# EAGLE board micronucleus_usb_dev_stick (EAGLE 9.5.2)
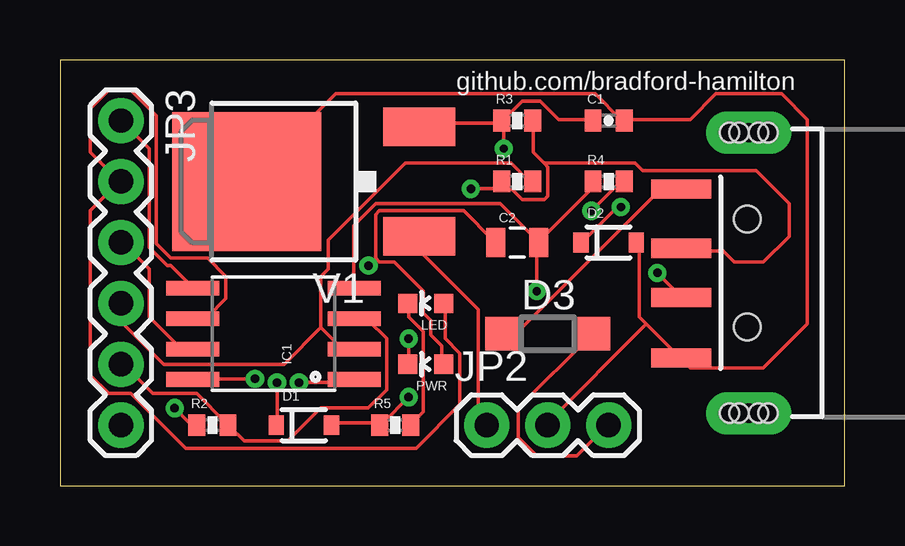
[diagram p0: board, top side]
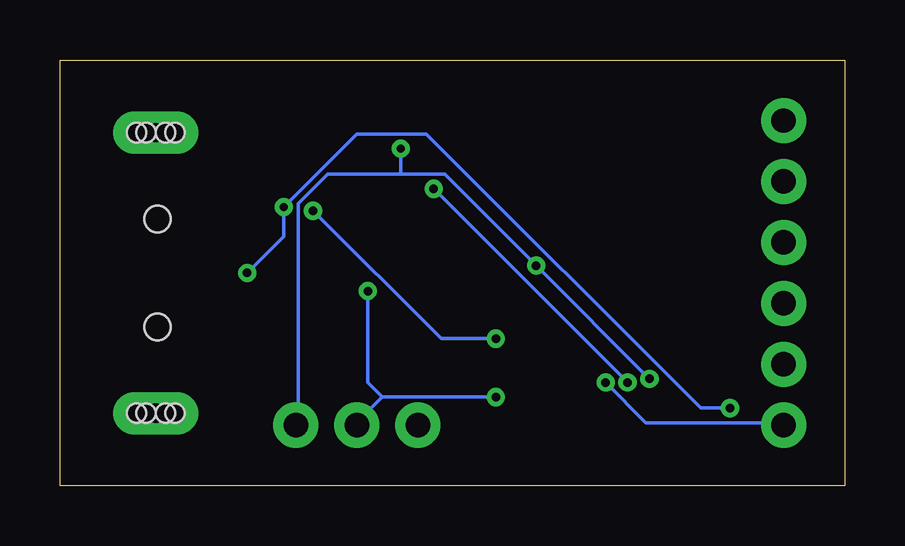
[diagram p1: board, bottom side, seen from below]

Size 32.69 x 17.77 mm. Coordinates in mm from the lower left corner, seen from the top.
Outline: 0,0 32.69,0 32.69,17.77 0,17.77 0,0
Copper layers (1*16): Top 0.035mm / dielectric 1.5mm / Bottom 0.035mm
Design rules "default": minimum track width 6mil, minimum drill 0.35mm, track to track 6mil, track to pad 6mil, pad to pad 6mil, via to via 6mil, smd to smd 6mil, copper to edge 40mil, drill to drill 6mil, minimum pad ring 10mil, minimum via ring 8mil, stop-mask expansion 4mil, vias tented up to drill 0mil, thermal gap 10mil

## Footprints (pad centres in the part's own frame; a part is rotated, then mirrored left to right if it is on the bottom)
0402-CAP = smd 0.7 x 0.9: 1 -0.65,0; 2 0.65,0
0805 = smd 0.8 x 1.2: 1 -0.9,0; 2 0.9,0
SOD-323 = smd 0.63 x 0.83: 1 -1.15,0; 2 1.15,0
SOD123 = smd 1.4 x 1.4: A 1.9,0; C -1.9,0
SO08-EIAJ = smd 0.61 x 2.21: 1 -1.905,-3.378; 2 -0.635,-3.378; 3 0.635,-3.378; 4 1.905,-3.378; 5 1.905,3.353; 6 0.635,3.353; 7 -0.635,3.353; 8 -1.905,3.353
USB-A-SMT-MALE = smd 2.5 x 0.8: D+1 10.95,1.027; D-1 10.95,-1.027; GND1 10.95,3.551; VBUS1 10.95,-3.5 | drill 0.8 pad 1.778 long: SHLD1 8.13,-5.85; SHLD2 8.13,5.85 | hole 1.1: 8.2,2.25; 8.2,-2.25 | hole 0.8: 8.53,-5.85; 8.93,-5.85; 7.73,-5.85; 7.33,-5.85; 8.53,5.85; 8.93,5.85; 7.73,5.85; 7.33,5.85
1X03 = drill 1.016 pad 1.88: 1 0,0; 2 2.54,0; 3 5.08,0
1X06 = drill 1.016 pad 1.88: 1 0,0; 2 2.54,0; 3 5.08,0; 4 7.62,0; 5 10.16,0; 6 12.7,0
LED-0603 = smd 0.8 x 0.8: A 0,-0.75; C 0,0.75
0402-RES = smd 0.7 x 0.9: 1 -0.65,0; 2 0.65,0
DPACK = smd 1.6 x 3: 1 -2.28,-4.8; 3 2.28,-4.8 | smd 5.8 x 6.2: 4 0,2.38

## Placement (x,y rotation side)
C1  0.1uf  [0402-CAP]  22.86,15.24 0 top
C2  4.7uf  [0805]  19.05,10.16 0 top
D1  3.6 Zener  [SOD-323]  10.16,2.54 0 top
D2  3.6 Zener  [SOD-323]  22.86,10.16 0 top
D3  MBR0520LT  [SOD123]  20.32,6.35 0 top
IC1  ATTINY85  [SO08-EIAJ]  8.89,6.35 90 top
J1  USB_A_SMT_MALE  [USB-A-SMT-MALE]  36.83,8.89 180 top
JP2  [1X03]  17.78,2.54 0 top
JP3  [1X06]  2.54,15.24 270 top
LED  [LED-0603]  15.24,7.62 90 top
PWR  [LED-0603]  15.24,5.08 90 top
R1  66.5R  [0402-RES]  19.05,12.7 0 top
R2  66.5R  [0402-RES]  6.35,2.54 0 top
R3  1K5  [0402-RES]  19.05,15.24 0 top
R4  1K  [0402-RES]  22.86,12.7 0 top
R5  1K  [0402-RES]  13.97,2.54 0 top
V1  MC78M05BDTRKG  [DPACK]  10.16,12.7 90 top

## Library data of the parts
C1 C2 D1 D2 IC1 JP2 JP3 LED PWR R1-R5 = SparkFun
D3 = diode
J1 = SparkFun-Connectors; PROD_ID: CONN-11499
V1 = v-reg

## Nets
5V: C1.1 C2.1 D3.A IC1.8 JP2.3 PWR.A R3.1 V1.3
GND: C1.2 C2.2 D1.2 D2.2 IC1.4 J1.GND1 JP2.2 R4.1 R5.1 V1.4
N$1: IC1.2 JP3.4 R1.2
N$2: IC1.6 JP3.2 LED.A
N$3: IC1.5 JP3.1
N$4: D3.C J1.VBUS1
N$5: IC1.7 JP3.3
N$6: IC1.3 JP3.5 R2.2
N$8: IC1.1 JP3.6
N$10: D1.1 J1.D-1 R1.1 R3.2
N$11: D2.1 J1.D+1 R2.1
N$12: LED.C R5.2
N$15: JP2.1 V1.1
N$17: PWR.C R4.2

## Tracks (layer width: path | path; a pad name or v marks a point on that pad's centre or on a via)
5V  (via drill 0.35)
  Top 0.152: R3.1 18.34,15.14 15.14,15.14 14.99,14.99 V1.3 | C1.1 22.15,15.29 20.78,15.29 20.02,16.05 19.25,16.05 18.49,15.29 R3.1 | 13.16,9.5 13.31,9.35 13.92,9.35 15.14,8.13 15.14,7.21 15.44,6.91 15.44,6.3 15.9,5.84 15.9,5.08 PWR.A | 13.16,9.5 13.16,11.33 13.31,11.48 16.81,11.48 18.03,10.26 C2.1 | D3.A 22.15,6.3 19.1,3.25 19.1,2.03 19.86,1.27 21.54,1.27 22.76,2.49 JP2.3 | v8.13,4.47 5.54,4.47 IC1.8 | v12.85,9.2 13.16,9.5 | v18.49,14.07 18.49,15.14 R3.1
  Bottom 0.152: v8.13,4.47 v12.85,9.2 16.66,13 18.49,13 | 18.49,13 21.54,13 22.76,11.79 22.76,2.64 JP2.3 | 18.49,13 v18.49,14.07
GND  (via drill 0.35)
  Top 0.152: V1.4 7.82,12.7 11.48,16.36 22.3,16.36 23.37,15.29 C1.2 23.52,15.29 26.26,15.29 27.33,16.36 30.07,16.36 31.14,15.29 31.14,6.76 29.31,4.93 26.26,4.93 25.96,5.23 J1.GND1 25.81,5.39 24.44,6.76 | R4.1 22.15,12.7 22.15,12.39 20.02,10.26 C2.2 | IC1.4 12.24,8.28 12.24,10.87 13.16,11.79 18.34,11.79 19.86,10.26 C2.2 | 24.44,6.76 24.13,7.06 24.13,10.11 D2.2 | D1.2 11.33,2.64 13.31,2.64 R5.1 13.46,2.64 v14.53,3.71 | 24.44,6.76 20.32,2.64 JP2.2 | v19.86,8.13 19.86,10.11 C2.2
  Bottom 0.152: 19.25,3.71 v14.53,3.71 | 19.25,3.71 20.32,2.64 JP2.2 | v19.86,8.13 19.86,4.32 19.25,3.71
N$1
  Top 0.152: 10.87,6.6 10.87,8.74 11.18,9.04 11.18,10.26 14.38,13.46 18.8,13.46 19.56,12.7 R1.2 | 10.87,6.6 11.63,5.84 12.24,5.84 IC1.2 | 10.87,6.6 9.35,5.08 4.32,5.08 2.64,6.76 2.64,7.52 JP3.4
N$2
  Top 0.152: 2.49,12.7 1.27,11.48 1.27,4.62 2.03,3.86 2.95,3.86 5.23,1.57 14.83,1.57 16.66,3.4 16.66,5.54 16.05,6.15 16.05,7.52 LED.A | 2.49,12.7 1.27,13.92 1.27,15.75 2.03,16.51 2.95,16.51 4.01,15.44 4.01,10.11 4.62,9.5 6.15,9.5 6.91,8.74 6.91,7.82 6.15,7.06 5.54,7.06 IC1.6 | 2.49,12.7 JP3.2
N$3
  Top 0.152: JP3.1 3.71,14.07 3.71,9.96 4.47,9.2 4.62,9.2 5.54,8.28 IC1.5
N$4
  Top 0.152: D3.C 18.49,6.45 19.1,6.45 24.89,12.24 25.81,12.24 J1.VBUS1
N$5
  Top 0.152: IC1.7 5.54,5.84 4.93,5.84 3.71,7.06 3.71,9.04 2.64,10.11 JP3.3
N$6
  Top 0.152: JP3.5 2.64,5.08 3.86,3.86 5.69,3.86 6.91,2.64 R2.2 7.06,2.49 7.67,1.88 9.5,1.88 10.87,3.25 12.85,3.25 13.61,4.01 13.61,6.15 12.85,6.91 12.4,6.91 IC1.3
N$8  (via drill 0.35)
  Top 0.152: v9.96,4.32 12.24,4.32 IC1.1
  Bottom 0.152: v9.96,4.32 8.28,2.64 2.64,2.64 JP3.6
N$10  (via drill 0.35)
  Top 0.152: v9.04,4.32 9.04,2.64 D1.1 | v17.12,12.39 18.03,12.39 18.34,12.7 R1.1 18.49,12.7 19.25,11.94 20.17,11.94 20.32,12.09 20.32,13.31 20.17,13.46 | 20.17,13.46 19.71,13.92 19.71,15.14 R3.2 | 20.17,13.46 23.98,13.46 24.28,13.16 29.01,13.16 30.38,11.79 30.38,10.41 29.31,9.35 28.09,9.35 27.63,9.8 25.96,9.8 J1.D-1
  Bottom 0.152: v17.12,12.39 v9.04,4.32
N$11  (via drill 0.35)
  Top 0.152: v23.37,11.63 23.22,11.63 21.84,10.26 D2.1 | v24.89,8.89 25.81,7.98 J1.D+1 | v4.78,3.25 5.38,2.64 5.69,2.64 R2.1
  Bottom 0.152: v24.89,8.89 23.37,10.41 v23.37,11.63 20.32,14.68 17.42,14.68 5.99,3.25 v4.78,3.25
N$12
  Top 0.152: LED.C 14.53,7.52 14.53,7.06 15.14,6.45 15.14,3.1 14.68,2.64 R5.2
N$15
  Top 0.152: V1.1 14.99,10.41 14.99,9.8 17.42,7.37 17.42,2.95 17.73,2.64 JP2.1
N$17  (via drill 0.35)
  Top 0.152: v14.53,6.15 14.53,5.08 PWR.C | v22.15,11.48 23.37,12.7 R4.2
  Bottom 0.152: v14.53,6.15 16.81,6.15 v22.15,11.48

## Text on the board
tNames: github.com/bradford-hamilton